# Altium PCB mag_pos_prog.PcbDoc
Units mm, origin at the board's own origin, x right, y up, seen from the top; angles counter-clockwise.
Board outline 57 x 27 mm, 2 copper layers (Top Layer, Bottom Layer), stack 1.071 mm thick; 14 components, 9 nets, 53 pads, 17 vias.
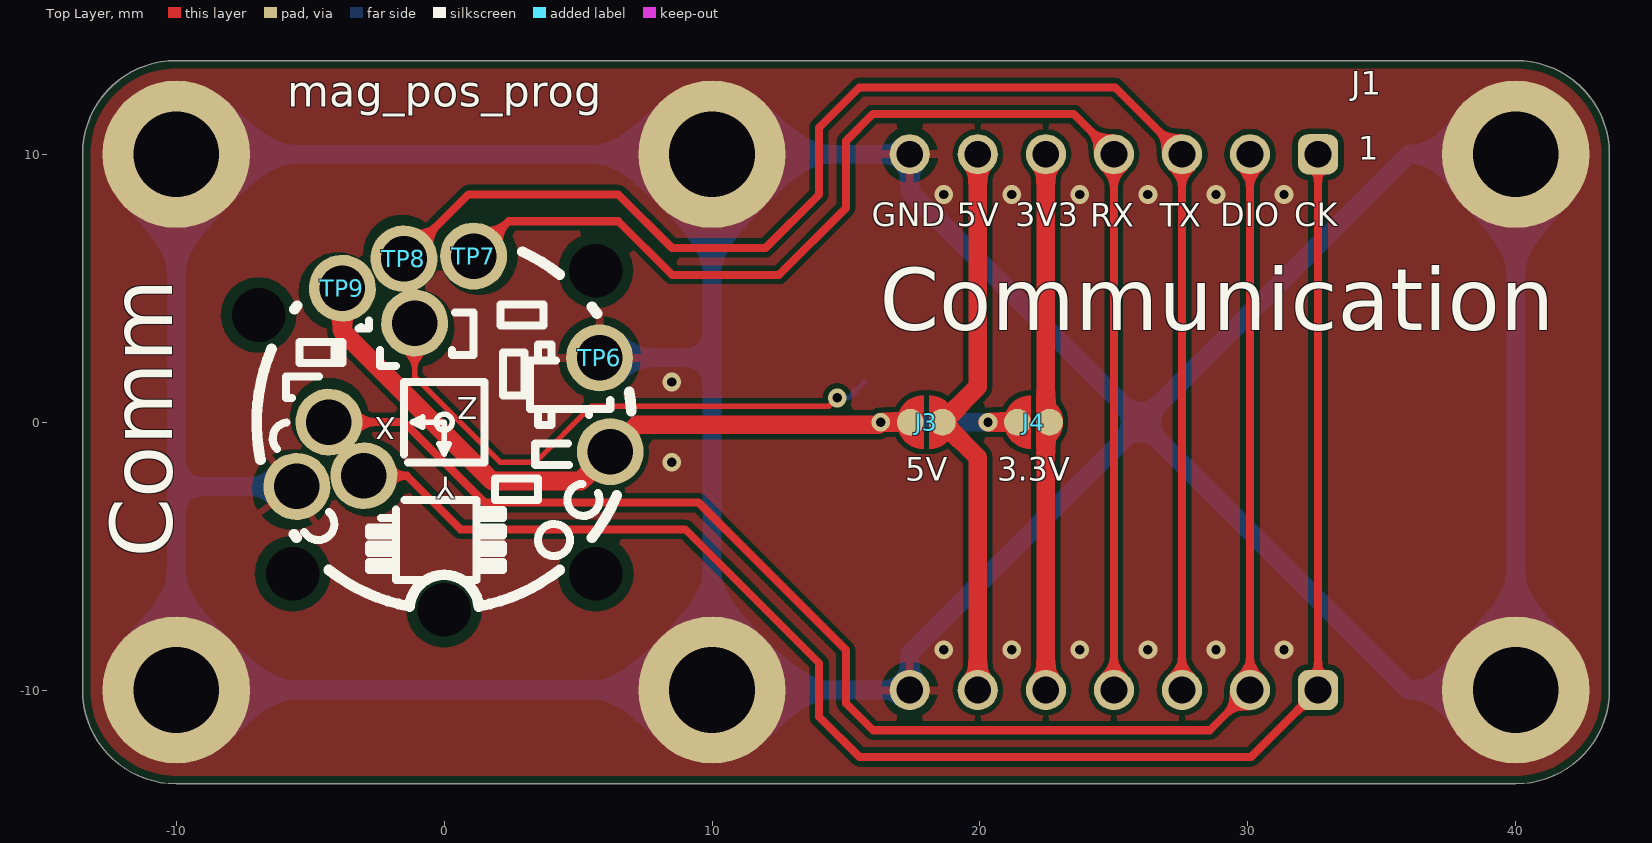
[diagram p0: Top Layer view]
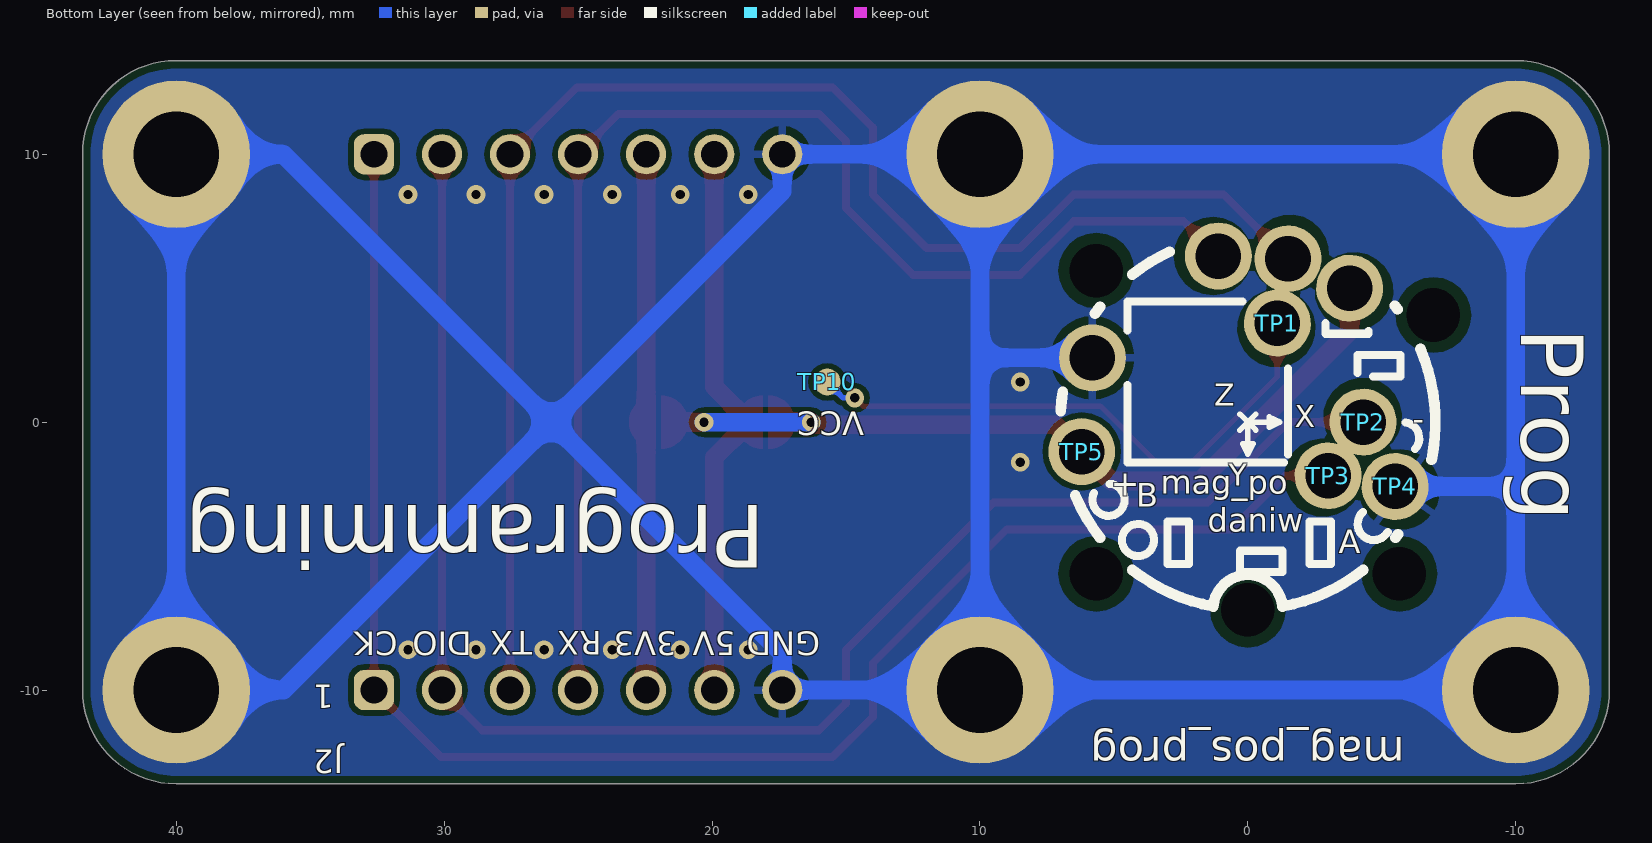
[diagram p1: Bottom Layer view, seen from below]

## Layer stack, top to bottom
Top Solder: solder mask 0.0102, Solder Resist, Dk 3.5
Top Layer: signal copper 0.0356
Dielectric 1: dielectric 1, FR-4, Dk 4.8
Bottom Layer: signal copper 0.0356
Bottom Solder: solder mask 0.0102, Solder Resist, Dk 3.5

## Board outline
-10,-13.5 cw(c-10,-10) -13.5,-10 -13.5,10 cw(c-10,10) -10,13.5 40,13.5 cw(c40,10) 43.5,10 43.5,-10 cw(c40,-10) 40,-13.5

## Design rules (kind name [scope] priority, off if disabled: settings)
Clearance Clearance_Mech [(PadViaLibraryTemplate = 'c0hn200')] p1: gap=0.3 ignorepadtopadclearanceinfootprint=FALSE except(0: Arc-Hole Track-Hole SMDPad-Hole THPad-Hole Via-Hole Fill-Hole Poly-Hole Region-Hole Text-Hole; 0.29: THPad-THPad; 0.4: Arc-Poly Track-Poly SMDPad-Poly THPad-Poly Via-Poly Fill-Poly Poly-Poly Poly-Region Poly-Text)
Clearance [All] p2: gap=0.2 ignorepadtopadclearanceinfootprint=FALSE except(0: Arc-Hole Track-Hole SMDPad-Hole THPad-Hole Via-Hole Fill-Hole Poly-Hole Region-Hole Text-Hole)
ComponentClearance [All] p1: gap=0.2 collisioncheckmode=3 verticalgap=0.2 showdistances=FALSE
HoleSize [All] p1: absolutevalues=TRUE maxlimit=3.2 minlimit=0.3 maxpercent=80.000 minpercent=20.000
HoleToHoleClearance [All] p1: gap=0.3 allowstackedmicrovias=TRUE
MinimumAnnularRing [All] p1: minimumring=0.15
MinimumSolderMaskSliver [All] p1: minsoldermaskwidth=0.1
PolygonConnect PolygonConnect_Standoff [(ObjectKind = 'Pad') And (PadViaLibraryTemplate = 'c550h320')] p1: connectstyle=Direct reliefconductorwidth=0.254 reliefentries=4 polygonreliefangle="90 Angle" airgapwidth=0.254
PolygonConnect [All] p2: thpad.connectstyle=Relief thpad.reliefconductorwidth=0.3 thpad.reliefentries=4 thpad.polygonreliefangle="90 Angle" thpad.airgapwidth=0.3 smdpad.connectstyle=Relief smdpad.reliefconductorwidth=0.25 smdpad.reliefentries=4 smdpad.polygonreliefangle="90 Angle" smdpad.airgapwidth=0.25 via.connectstyle=Direct via.reliefconductorwidth=0.254 via.reliefentries=4 via.polygonreliefangle="90 Angle" via.airgapwidth=0.254
RoutingVias [All] p1: holewidth=0.35 width=0.7 viastyle="Through Hole" minholewidth=0.3 minwidth=0.65 maxholewidth=0.7 maxwidth=3
SilkToSilkClearance [All] p1: silktosilkclearance=0.1
SilkToSolderMaskClearance [IsPad] p1: minsilkscreentomaskgap=0.15 clearancetoexposedcopper=TRUE
SolderMaskExpansion SolderMaskExpansion_Via [IsVia] p1: expansion=0.102 istentingtop=TRUE
SolderMaskExpansion [All] p2: expansion=0.05 istentingtop=FALSE
Width [All] p1: maxlimit=0.7 minlimit=0.2 preferedwidth=0.2 minimp=50.000000 maximp=50.000000 favimp=50.000000
24 further rules are at their usual default settings.

## Components (designator, comment, footprint, x,y, rotation, side; value= is the part's Value field where it differs from the comment)
J1 "Header_7X1" HDRV7W64P254_1X7_1778X254X800P 32.62,10 r180 top
J2 "Header_7X1" HDRV7W64P254_1X7_1778X254X800P 32.62,-10 r180 bottom
J3 "5V" Solder_Jumper_2pin_0.2mm 18,0 r180 top
J4 "3.3V" Solder_Jumper_2pin_0.2mm 22,0 r180 top
TP1 "VCC" TP_SPRING_PROBE_1.7MM_2.5MM#1 -1.1,3.7 r296.5 bottom
TP2 "RST" TP_SPRING_PROBE_1.7MM_2.5MM#1 -4.3,0 r270 bottom
TP3 "TEST" TP_SPRING_PROBE_1.7MM_2.5MM#1 -3,-2 r270 bottom
TP4 "GND" TP_SPRING_PROBE_1.7MM_2.5MM#1 -5.5,-2.4 r180 bottom
TP5 "+5V" TP_SPRING_PROBE_1.7MM_2.5MM#2 6.2,-1.1 r180 bottom
TP6 "GND" TP_SPRING_PROBE_1.7MM_2.5MM#2 5.8,2.4 r180 top
TP7 "RX" TP_SPRING_PROBE_1.7MM_2.5MM#1 1.1,6.2 r90 top
TP8 "TX" TP_SPRING_PROBE_1.7MM_2.5MM#1 -1.5,6.1 r296.5 top
TP9 "+5V" TP_SPRING_PROBE_1.7MM_2.5MM#1 -3.8,5 r296.5 top
TP10 "VCC" TP_SMD_1MM 15.7,1.5 r180 bottom

## Footprints (in the part's own frame and the unit in brackets; to place one, negate y for a bottom-side part, rotate by r counter-clockwise, add the part's x,y. Pads: shape width x height; smd on the part's side, far side on the other; paste and mask are expansions set on the pad)
HDRV7W64P254_1X7_1778X254X800P [mm] "Header, vertical, 2.54mm pitch, 0.635mm lead width, 7 pins, 1 row, 7 pins per row, 17.78mm L x 2.54mmW x 8.mmmm H body"
  rrect50% 1.5x1.5 hole 1: 1(0,0)
  round 1.5 hole 1: 2(2.54,0) 3(5.08,0) 4(7.62,0) 5(10.16,0) 6(12.7,0) 7(15.24,0)
  body extent -1.27,-1.27 16.51,1.27, height 8
Solder_Jumper_2pin_0.2mm [mm] "Solder jumper with two pins with a spacing of 0.2mm"
  round 1 smd: 1(-0.6,0) 2(0.6,0)
  Top Layer region: -0.1,1 -0.483,0.924 -0.807,0.707 -1.024,0.383 -1.1,0 -1.1,0 -1.024,-0.383 -0.807,-0.707 -0.483,-0.924 -0.1,-1 -0.1,-1
  Top Layer region: 0.1,-1 0.483,-0.924 0.807,-0.707 1.024,-0.383 1.1,0 1.1,0 1.024,0.383 0.807,0.707 0.483,0.924 0.1,1 0.1,1
TP_SMD_1MM [mm] "Testpoint SMD 1mm"
  round 1 smd: 1(0,0)
  body extent -0.5,-0.5 0.5,0.5, height 0.1
TP_SPRING_PROBE_1.7MM_2.5MM#1 [mm] "Spring probe sleeve 1.7mm hole diameter, 2.5mm pad size, Harwin S25-022"
  round 2.1 hole 1.7: 1(0,0)
  body extent -0.91,-0.92 0.92,0.91, height 5.44
TP_SPRING_PROBE_1.7MM_2.5MM#2 [mm] "Spring probe sleeve 1.7mm hole diameter, 2.5mm pad size, Harwin S25-022"
  round 2.5 / inner round 2.1 / far side round 2.5 hole 1.7: 1(0,0)
  body extent -0.92,-0.92 0.92,0.91, height 5.44

## Part data
J1 J2: "Header 7x1 pins"
J3 J4: library part SolderJumper_2
TP1 TP2 TP3 TP4 TP5 TP6 TP7 TP8 TP9: library part TP_SPRING_PROBE_1.7MM, "Spring probe sleeve 1.7mm hole diameter, 2.5mm pad size, Harwin S25-022", System=Connector
TP10: library part TP_SMD_1mm, "Testpoint SMD 1mm"

## Free pads (board coordinates)
  round 5.5 hole 3.2: 0(-10,-10) 0(-10,10) 0(10,-10) 0(10,10) 0(40,-10) 0(40,10)
  round 0 hole 2 unplated: 0(-6.928,4) 0(-5.657,-5.657) 0(0,-7) 0(5.657,-5.657) 0(5.657,5.657)
  round 2.5 smd: 1(-5.5,-2.4) 1(-4.3,0) 1(-3.8,5) 1(-3,-2) 1(-1.5,6.1) 1(-1.1,3.7) 1(1.1,6.2)
  round 2.5 smd far side: 1(-5.5,-2.4) 1(-4.3,0) 1(-3.8,5) 1(-3,-2) 1(-1.5,6.1) 1(-1.1,3.7) 1(1.1,6.2)

## Via types
v1: diameter 0.7, hole 0.35, Top Layer to Bottom Layer, tented both sides, 17 vias

## Nets (pads, with @x,y where several pads share a name; then routed paths per layer and width w, separated by ;. In a path a pad name is that pad's centre, name@x,y a point inside that pad or via, vN(x,y) a via of type N, cw(c..) or ccw(c..) an arc to the next point about the centre after c; other vN are vias at no path point)
+3V3: J1.5 J2.5 J4.1 | length 20.1
  Top Layer w0.7: J2.5 22.46,-0.14 J4.1 22.46,0.14 J1.5
+5V: J1.6 J2.6 J3.1 | length 21.1
  Top Layer w0.7: J2.6 19.92,-1.32 J3.1 19.92,1.32 J1.6
GND: J1.7 J2.7 pad.0@10,10 pad.0@10,-10 pad.0@40,10 pad.0@40,-10 pad.0@-10,10 pad.0@-10,-10 pad.1@-5.5,-2.4 TP4.1 TP6.1 | length 186.9
  Bottom Layer w0.7: TP4.1 -10,-2.4 ; TP6.1 10,2.4 ; -10,-2.4 -10,10 pad.0@10,10 ; -10,-2.4 -10,-10 pad.0@10,-10 ; pad.0@10,-10 10,2.4 ; pad.0@10,-10 J2.7 17.38,-8.62 26,0 ; 10,2.4 pad.0@10,10 ; pad.0@10,10 J1.7 17.38,8.62 26,0 ; 26,0 36,-10 40,-10 40,10 36,10 26,0
  other v1: 18.65,-8.5 21.19,-8.5 23.73,-8.5 26.27,-8.5 28.81,-8.5 31.35,-8.5 8.5,-1.5 8.5,1.5 18.65,8.5 21.19,8.5 23.73,8.5 26.27,8.5 28.81,8.5 31.35,8.5
RX: J1.4 J2.4 pad.1@1.1,6.2 TP7.1 | length 49.8
  Top Layer w0.3: TP7.1 2.4,7.5 6.5,7.5 8.5,5.5 12.5,5.5 15,8 15,10.5 16,11.5 23.5,11.5 J1.4 J2.4
SBWTCK: J1.1 J2.1 pad.1@-3,-2 TP3.1 | length 62.2
  Top Layer w0.3: TP3.1 -1.394,-2 0.606,-4 9,-4 14,-9 14,-11 15.5,-12.5 30.12,-12.5 J2.1 J1.1
SBWTDIO: J1.2 J2.2 pad.1@-4.3,0 TP2.1 | length 60.9
  Top Layer w0.3: TP2.1 -1.5,0 1.5,-3 9.5,-3 15,-8.5 15,-10.495 16.005,-11.5 28.58,-11.5 J2.2 J1.2
TX: J1.3 J2.3 pad.1@-1.5,6.1 TP8.1 | length 55.8
  Top Layer w0.3: TP8.1 0.9,8.5 6.5,8.5 8.5,6.5 12,6.5 14,8.5 14,11 15.5,12.5 25.04,12.5 J1.3 J2.3
VCC: pad.1@-1.1,3.7 TP1.1 TP10.1 | length 21.4
  Top Layer w0.2: TP1.1 -1.1,1.7 2.1,-1.5 3.4,-1.5 5.5,0.6 14.367,0.6 v1(14.673,0.906)
  Bottom Layer w0.2: v1(14.673,0.906) 15.106,0.906 TP10.1
VIN: J3.2 J4.2 pad.1@-3.8,5 TP5.1 TP9.1 | length 31.1
  Top Layer w0.7: TP9.1 -3.8,3.4 1.8,-2.2 5.1,-2.2 TP5.1 7.2,-0.1 16.2,-0.1 v1(16.3,0) J3.2 ; v1(20.3,0) J4.2
  Bottom Layer w0.7: v1(16.3,0) v1(20.3,0)

## Polygon pours and split planes (outlines as drawn)
GND on Top Layer "GND_L01_P031" (solid, remove dead copper, pour order 31): -13.2,-10 -13.2,10 cw(c-10,10) -10,13.2 40,13.2 cw(c40,10) 43.2,10 43.2,-10 cw(c40,-10) 40,-13.2 -10,-13.2 cw(c-10,-10)
no net on Top Layer "NONET_L01_P009" (solid, remove dead copper, pour order 9): -31,3.5
GND on Bottom Layer "GND_L02_P030" (solid, remove dead copper, pour order 30): -13.2,-10 -13.2,10 cw(c-10,10) -10,13.2 40,13.2 cw(c40,10) 43.2,10 43.2,-10 cw(c40,-10) 40,-13.2 -10,-13.2 cw(c-10,-10)

## Silkscreen, mask and mechanical layers (free items; w line width, h text height)
Top Overlay:
  circle w0.2: c0,0 r0.3
  circle w0.3: c4.1,-4.4 r0.6
  lines w0.2: -1.2,0 -0.8,0.2 -0.8,-0.2 -1.2,0 ; -1.2,0 0,0 0,-1.2 ; 0,-1.2 -0.2,-0.8 0.2,-0.8 0,-1.2
  lines w0.3: -6.241,-1.007 cw(c-5.8,-0.6) -5.878,-0.005 ; -5.675,0.9 -5.9,0.9 -5.9,1.7 -4.678,1.7 ; -5.222,-4.095 ccw(c-4.7,-3.8) -4.3,-3.353 ; -4.1,2.2 -4.1,3 ; -3.2,3.5 -2.8,3.5 -2.8,3.8 ; -3.1,3.5 -3.1,3.55 ; -2.4,2.7 -2.4,2.1 -1.8,2.1 ; -2.362,-3.575 -1.8,-3.575 ; -1.8,-5.525 -2.8,-5.525 -2.8,-5.225 -1.8,-5.225 ; -1.8,-4.875 -2.8,-4.875 -2.8,-4.575 -1.8,-4.575 ; -1.8,-4.225 -2.8,-4.225 -2.8,-3.925 -1.8,-3.925 ; -1.8,-3.254 -1.8,-5.9 -0.667,-5.9 ; -1.5,-1.201 -1.5,1.5 1.5,1.5 1.5,-1.5 -1.347,-1.5 ; -1.485,-2.9 1.2,-2.9 1.2,-5.9 0.667,-5.9 ; 0.3,2.7 0.3,2.5 1.1,2.5 1.1,4.1 0.4,4.1 ; 1.2,-5.525 2.2,-5.525 2.2,-5.225 1.2,-5.225 ; 1.2,-4.875 2.2,-4.875 2.2,-4.575 1.2,-4.575 ; 1.2,-4.225 2.2,-4.225 2.2,-3.925 1.2,-3.925 ; 1.2,-3.575 2.2,-3.575 2.2,-3.275 1.2,-3.275 ; 3.5,0.5 3.5,-0.1 4,-0.1 4,0.5 ; 3.5,2.3 3.5,2.9 4,2.9 4,2.3 ; 4.183,2.3 3.2,2.3 3.2,0.5 6.2,0.5 6.2,0.826 ; 4.618,-0.8 3.4,-0.8 3.4,-1.6 4.657,-1.6 ; 5.16,-2.301 ccw(c5.2,-2.9) 5.744,-2.646 ; 5.4,0.271 5.4,0.5 ; -5.4,2.2 -5.4,3 -3.8,3 -3.8,2.2 -5.4,2.2 ; 1.9,-2.9 3.5,-2.9 3.5,-2.1 1.9,-2.1 1.9,-2.9 ; 2.1,3.6 2.1,4.4 3.7,4.4 3.7,3.6 2.1,3.6 ; 2.2,1 2.2,2.6 3,2.6 3,1 2.2,1
  lines w0.4: -6.859,-1.4 cw(c0,0) -6.444,2.735 ; -5.609,-4.189 ccw(c0,0) -5.516,-4.31 ; -5.59,4.213 cw(c0,0) -5.484,4.35 ; -4.31,-5.516 ccw(c0,0) -1.294,-6.879 cw(c0,-7) 1.294,-6.879 ccw(c0,0) 4.31,-5.516 ; 2.927,6.359 cw(c0,0) 4.31,5.516 ; 5.516,-4.31 ccw(c0,0) 6.441,-2.741 ; 5.516,4.31 cw(c0,0) 5.707,4.054 ; 6.909,1.128 cw(c0,0) 6.987,0.419
  text "mag_pos_prog" at -5.855,11.376 h2
  text "GND" at 15.961,7.017 h1.5
  text "5V" at 19.133,7.017 h1.5
  text "3V3" at 21.326,7.017 h1.5
  text "RX" at 24.126,7 h1.5
  text "TX" at 26.704,7 h1.5
  text "DIO" at 28.97,7.017 h1.5
  text "CK" at 31.723,7.017 h1.5
  text "Communication" at 16.268,2.674 h4
  text "Z" at 1.249,1.217 h1.4 r180
  text "X" at -1.809,0.468 h1.4 r180
  text "Y" at 0.404,-1.754 h1.4 r180
  text "5V" at 17.213,-2.483 h1.5
  text "3.3V" at 20.654,-2.483 h1.5
  text "Comm" at -9.393,-5.07 h4 r90
Bottom Overlay:
  circle w0.3: c4.1,-4.4 r0.6
  lines w0.2: -0.3,-0.3 0.3,0.3 ; -0.3,0.3 0.3,-0.3 ; -1.2,0 -0.8,0.2 -0.8,-0.2 -1.2,0 ; -1.2,0 0,0 0,-1.2 ; 0,-1.2 -0.2,-0.8 0.2,-0.8 0,-1.2
  lines w0.3: -6.241,-1.007 cw(c-5.8,-0.6) -5.878,-0.005 ; -5.222,-4.095 ccw(c-4.7,-3.8) -4.301,-3.352 ; -4.675,1.7 -5.7,1.7 -5.7,2.5 -4.1,2.5 -4.1,1.827 ; -4.5,3.4 -4.5,3.3 -2.9,3.3 -2.9,3.693 ; -1.5,-1.205 -1.5,2 ; -1.344,-1.5 4.5,-1.5 4.5,1.389 ; 0.2,4.5 4.5,4.5 4.5,3.42 ; 5.16,-2.301 ccw(c5.2,-2.9) 5.744,-2.647 ; -3.1,-5.3 -2.3,-5.3 -2.3,-3.7 -3.1,-3.7 -3.1,-5.3 ; -1.3,-5.6 0.3,-5.6 0.3,-4.8 -1.3,-4.8 -1.3,-5.6 ; 2.2,-5.3 3,-5.3 3,-3.7 2.2,-3.7 2.2,-5.3
  lines w0.4: -6.859,-1.4 cw(c0,0) -6.444,2.735 ; -5.609,-4.189 ccw(c0,0) -5.516,-4.31 ; -5.59,4.213 cw(c0,0) -5.484,4.35 ; -4.31,-5.516 ccw(c0,0) -1.294,-6.879 cw(c0,-7) 1.294,-6.879 ccw(c0,0) 4.31,-5.516 ; 2.927,6.359 cw(c0,0) 4.31,5.516 ; 5.516,-4.31 ccw(c0,0) 6.441,-2.741 ; 5.516,4.31 cw(c0,0) 5.705,4.056 ; 6.909,1.128 cw(c0,0) 6.987,0.419
  text "Prog" at -9.437,3.524 h4 r90
  text "VCC" at 14.315,0.683 h1.5 r180
  text "-" at -6.576,0.642 h1.5 r180
  text "Z" at 1.261,0.327 h1.4
  text "X" at -1.759,-0.466 h1.4
  text "+" at 4.031,-1.602 h1.6 r180
  text "Programming" at 18.008,-2.343 h4 r180
  text "Y" at 0.703,-2.656 h1.4
  text "mag_po" at 3.251,-2.971 h1.5
  text "B" at 4.172,-3.465 h1.5
  text "daniw" at 1.5,-4.385 h1.5
  text "A" at -3.4,-5.2 h1.5
  text "RX" at 24.126,-7.5 h1.5 r180
  text "TX" at 26.704,-7.5 h1.5 r180
  text "GND" at 15.961,-7.517 h1.5 r180
  text "5V" at 19.133,-7.517 h1.5 r180
  text "3V3" at 21.326,-7.517 h1.5 r180
  text "DIO" at 28.97,-7.517 h1.5 r180
  text "CK" at 31.723,-7.517 h1.5 r180
  text "mag_pos_prog" at -5.855,-11.376 h2 r180
Board:
  the board outline again, w0.2
Drill Drawing:
  lines w0.2: -13.2,-10 ccw(c-10,-10) -10,-13.2 40,-13.2 ccw(c40,-10) 43.2,-10 43.2,10 ccw(c40,10) 40,13.2 -10,13.2 ccw(c-10,10) -13.2,10 -13.2,-10

## Text inside footprints (layer, text, board x,y; h text height)
J1: Top Assembly "1" at 33.128,8.476 h1.5 r180; Top Overlay "1" at 34.12,9.5 h1.5
J2: Bottom Overlay "1" at 34.12,-9.5 h1.5 r180; Bottom Assembly "1" at 33.128,-8.476 h1.5